# EAGLE board TOP_pcb_redonda (EAGLE 9.6.2)
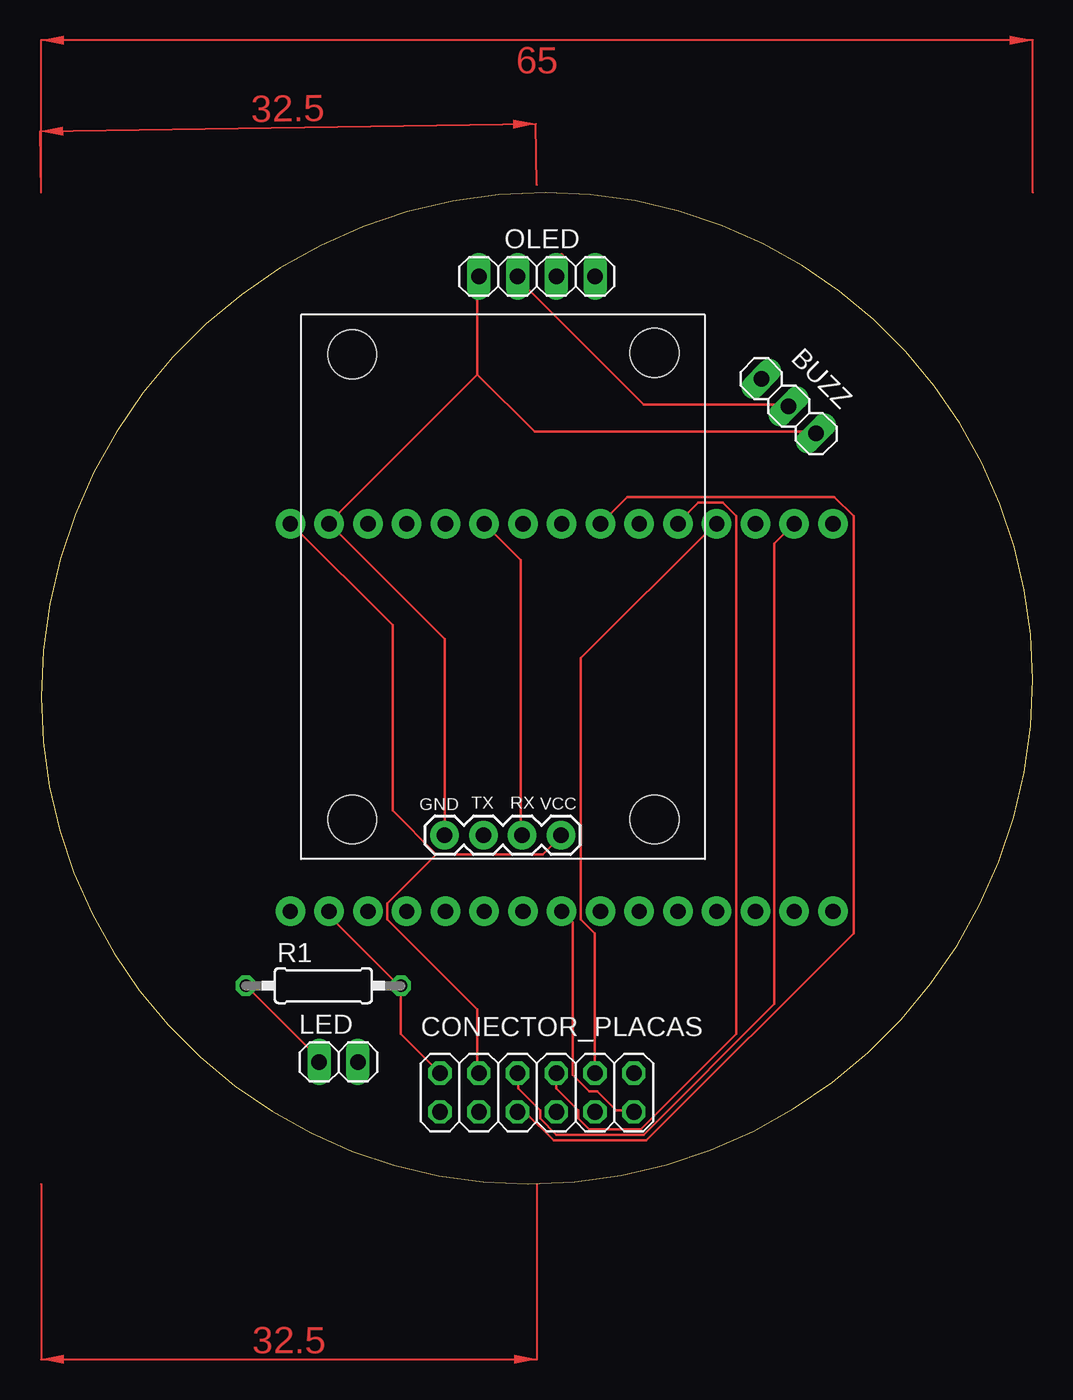
[diagram p0: board, top side]
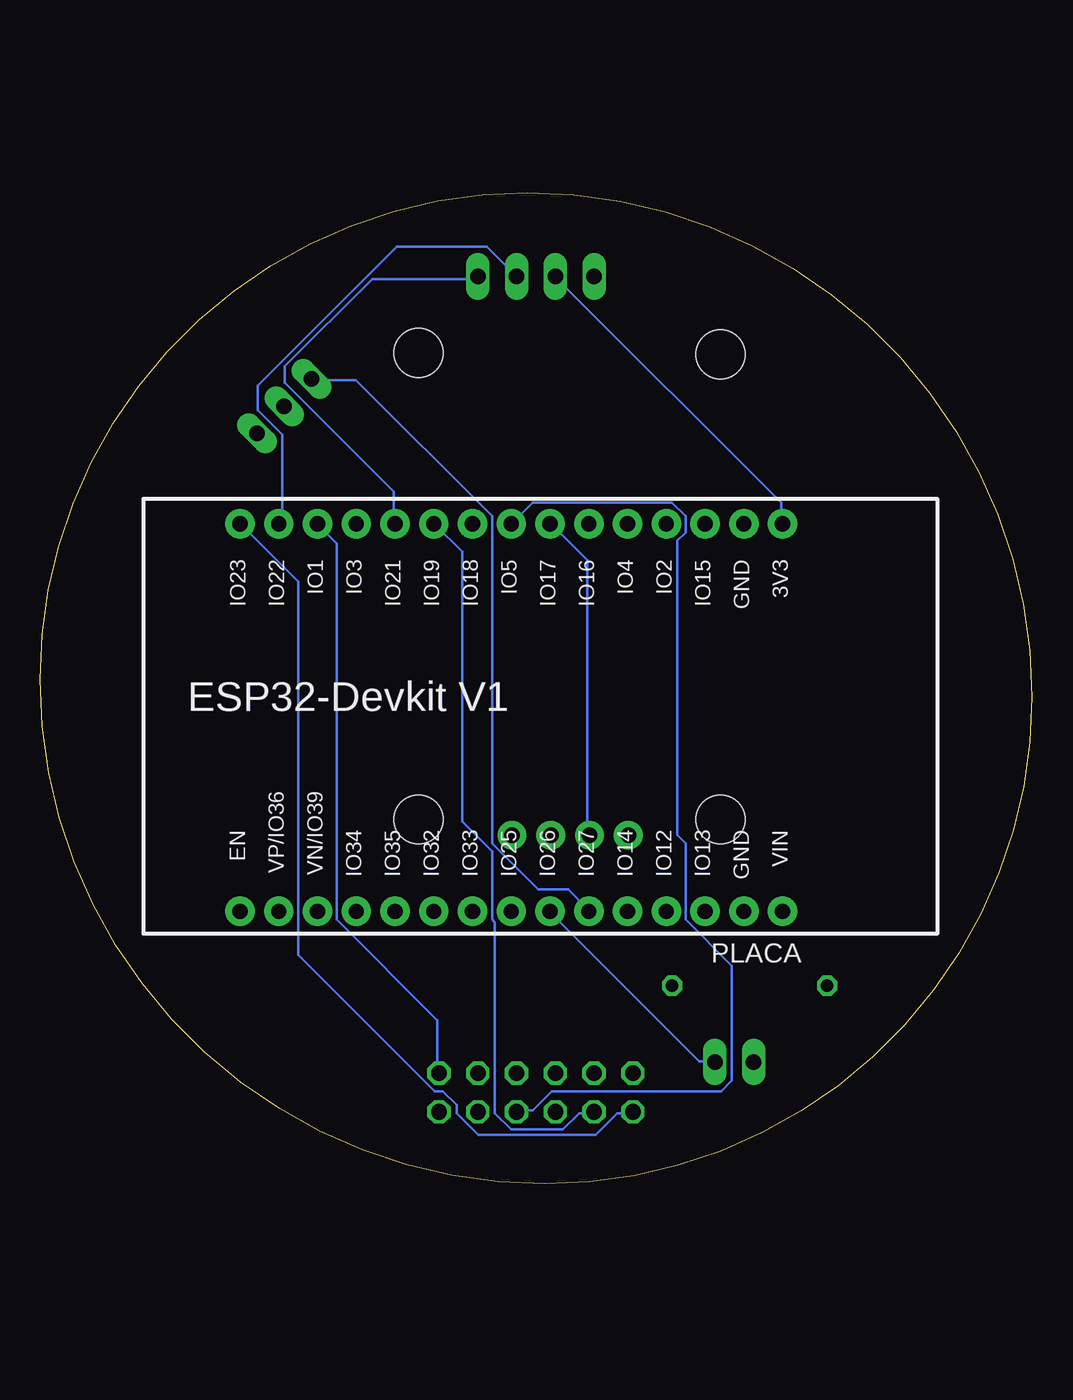
[diagram p1: board, bottom side, seen from below]

Size 65 x 65 mm. Coordinates in mm from the lower left corner, seen from the top.
Outline: 0,31.93 arc90 31.93,0 arc90 65,33.06 arc90 33.06,65 arc90 0,31.93
Copper layers (1*16): Top 0.035mm / dielectric 1.5mm / Bottom 0.035mm
Design rules "default": minimum track width 6mil, minimum drill 0.35mm, track to track 6mil, track to pad 6mil, pad to pad 6mil, via to via 6mil, smd to smd 6mil, copper to edge 40mil, drill to drill 6mil, minimum pad ring 10mil, minimum via ring 8mil, stop-mask expansion 4mil, vias tented up to drill 0mil, thermal gap 10mil
Net classes: 0 default: clearance 0.205 mm

## Footprints (pad centres in the part's own frame; a part is rotated, then mirrored left to right if it is on the bottom)
1X03 = drill 1.016 long: 1 -2.54,0; 2 0,0; 3 2.54,0
2X06 = drill 1.016 octagon: 1 -6.35,-1.27; 2 -6.35,1.27; 3 -3.81,-1.27; 4 -3.81,1.27; 5 -1.27,-1.27; 6 -1.27,1.27; 7 1.27,-1.27; 8 1.27,1.27; 9 3.81,-1.27; 10 3.81,1.27; 11 6.35,-1.27; 12 6.35,1.27
U-BLOX-NEO6V2 = drill 1.016 pad 1.88: GND 17.05,34.13; RX 11.97,34.13; TX 14.51,34.13; VCC 9.43,34.13 | hole 3.2: 3.3,33.1; 23.1,33.1; 3.3,2.5; 23.1,2.6
1X02 = drill 1.016 long: 1 -1.27,0; 2 1.27,0
1X04 = drill 1.016 long: 1 -3.81,0; 2 -1.27,0; 3 1.27,0; 4 3.81,0
ESP32-DEVKITV1 = drill 1 pad 1.93: 3V3 -16.52,-12.27; D1 13.96,-12.27; D2 -8.9,-12.27; D3 11.42,-12.27; D4 -6.36,-12.27; D5 1.26,-12.27; D12 -8.9,13.135; D13 -11.44,13.135; D14 -6.36,13.135; D15 -11.44,-12.27; D16 -3.82,-12.27; D17 -1.28,-12.27; D18 3.8,-12.27; D19 6.34,-12.27; D21 8.88,-12.27; D22 16.5,-12.27; D23 19.04,-12.27; D25 1.26,13.135; D26 -1.28,13.135; D27 -3.82,13.135; D32 6.34,13.135; D33 3.8,13.135; D34 11.42,13.135; D35 8.88,13.135; D36 16.5,13.135; D39 13.96,13.135; EN 19.04,13.135; GND@1 -13.98,13.135; GND@2 -13.98,-12.27; VIN -16.52,13.135
0207/10 = drill 0.813 octagon: 1 -5.08,0; 2 5.08,0

## Placement (x,y rotation side)
BUZZ  [1X03]  49,51 315 top
CONECTOR_PLACAS  [2X06]  32.5,6 0 top
GPS  U-BLOX-NEO6V2  [U-BLOX-NEO6V2]  43.5,57 180 top
LED  [1X02]  19.5,8 0 top
OLED  [1X04]  32.5,59.5 0 top
PLACA  ESP32DEVKITV1  [ESP32-DEVKITV1]  32.86,31.01 180 bottom
R1  [0207/10]  18.5,13 0 top

## Library data of the parts
BUZZ CONECTOR_PLACAS LED OLED = pinhead
GPS = u-blox neo-6m v2
PLACA = ESP32-DEVKITV1
R1 = rcl; SPICEPREFIX: R

## Nets
GPS: BUZZ.3 GPS.GND OLED.1 PLACA.GND@2
N$1: BUZZ.2 CONECTOR_PLACAS.4 GPS.VCC OLED.2 PLACA.3V3
N$2: CONECTOR_PLACAS.2 PLACA.GND@1 R1.2
N$4: CONECTOR_PLACAS.6 OLED.3 PLACA.D22
N$5: CONECTOR_PLACAS.8 OLED.4 PLACA.D21
N$6: CONECTOR_PLACAS.10 PLACA.D3
N$7: CONECTOR_PLACAS.12 PLACA.D1
N$8: GPS.RX PLACA.D16
N$9: GPS.TX PLACA.D17
N$10: CONECTOR_PLACAS.11 PLACA.D25
N$11: LED.2 PLACA.D26
N$12: LED.1 R1.1
N$13: BUZZ.1 PLACA.D27
N$14: CONECTOR_PLACAS.1 PLACA.D23
N$15: CONECTOR_PLACAS.3 PLACA.D19
N$16: CONECTOR_PLACAS.5 PLACA.D18
N$17: CONECTOR_PLACAS.7 PLACA.D5

## Tracks (layer width: path | path; a pad name or v marks a point on that pad's centre or on a via)
GPS
  Top 0.152: 28.59,53.07 28.59,59.33 OLED.1 | 28.59,53.07 18.94,43.42 PLACA.GND@2 18.94,43.24 26.45,35.74 GPS.GND | 28.59,53.07 32.34,49.32 50.75,49.32 BUZZ.3
N$1
  Top 0.152: 25.91,21.62 22.7,18.41 22.7,17.33 28.59,11.44 28.59,7.33 CONECTOR_PLACAS.4 | 25.91,21.62 32.88,21.62 33.95,22.7 GPS.VCC | BUZZ.2 48.96,51.11 39.49,51.11 31.27,59.33 OLED.2 | 25.91,21.62 23.05,24.48 23.05,36.63 16.44,43.24 PLACA.3V3
  Bottom 0.152: PLACA.3V3 16.44,43.42 16.44,44.67 31.09,59.33 OLED.2
N$2
  Top 0.152: CONECTOR_PLACAS.2 26.09,7.33 23.59,9.83 23.59,12.87 R1.2 23.41,13.04 18.94,17.51 18.94,17.87 PLACA.GND@1
N$4
  Top 0.152: 34.37,60.6 34.36,60.61 | 34.36,60.61 34.14,60.96 | 34.36,60.61 34.31,60.58 34.31,60.04 OLED.3 | CONECTOR_PLACAS.6 31.27,7.15 31.27,6.25 32.7,4.83 32.7,4.29 33.77,3.22 39.49,3.22 48.07,11.79 48.07,41.99 49.32,43.24 PLACA.D22
  Bottom 0.152: OLED.3 35.74,61.47 41.64,61.47 50.75,52.36 50.75,50.75 49.14,49.14 49.14,43.6 49.32,43.42 PLACA.D22
N$5
  Top 0.152: CONECTOR_PLACAS.8 33.77,7.15 33.77,6.25 35.2,4.83 35.2,4.29 35.92,3.57 39.31,3.57 45.57,9.83 45.57,43.78 44.67,44.67 43.07,44.67 41.82,43.42 PLACA.D21
  Bottom 0.152: OLED.4 36.45,59.33 43.24,59.33 48.96,53.61 48.96,52.54 41.82,45.39 41.82,43.42 PLACA.D21
N$6
  Top 0.152: CONECTOR_PLACAS.10 36.28,7.33 36.28,16.44 35.38,17.33 35.38,34.49 44.14,43.24 PLACA.D3
N$7
  Bottom 0.152: CONECTOR_PLACAS.12 38.96,7.33 38.96,10.72 45.57,17.33 45.57,41.99 46.82,43.24 PLACA.D1
N$8
  Top 0.152: GPS.RX 31.45,22.87 31.45,40.92 29.13,43.24 PLACA.D16
N$9
  Bottom 0.152: 29.04,22.93 GPS.TX 29.13,22.87 29.13,40.92 31.45,43.24 PLACA.D17
N$10
  Top 0.152: CONECTOR_PLACAS.11 38.78,4.83 37.71,4.83 36.45,6.08 35.92,6.08 34.85,7.15 34.85,17.16 34.13,17.87 PLACA.D25
N$11
  Bottom 0.152: 20.81,8.01 LED.2 20.91,8.04 21.8,8.04 31.45,17.69 PLACA.D26 31.46,17.76
N$12
  Top 0.152: R1.1 13.58,12.87 18.41,8.04 LED.1
N$13
  Bottom 0.152: 47.18,52.66 BUZZ.1 47.18,52.72 44.32,52.72 35.38,43.78 35.38,22.34 32.34,19.3 30.38,19.3 29.13,18.05 PLACA.D27 29.18,17.92
N$14
  Bottom 0.152: CONECTOR_PLACAS.1 26.27,4.65 27.16,4.65 28.59,3.22 36.28,3.22 37.71,4.65 37.71,5.18 38.6,6.08 39.13,6.08 48.07,15.01 48.07,39.49 51.82,43.24 PLACA.D23
N$15
  Bottom 0.152: CONECTOR_PLACAS.3 28.77,4.65 29.66,4.65 30.74,3.57 34.13,3.57 35.2,4.65 35.2,17.16 35.38,17.33 35.38,21.8 37.35,23.77 37.35,41.46 39.13,43.24 PLACA.D19
N$16
  Top 0.152: CONECTOR_PLACAS.5 31.27,4.65 31.81,4.65 33.6,2.86 39.67,2.86 53.25,16.44 53.25,43.78 52,45.03 38.42,45.03 36.81,43.42 PLACA.D18
N$17
  Bottom 0.152: CONECTOR_PLACAS.7 33.6,4.83 32.7,4.83 31.45,6.08 20.37,6.08 19.66,6.79 19.66,14.3 22.7,17.33 22.7,22.34 23.23,22.87 23.23,42.17 22.7,42.71 22.7,43.78 23.59,44.67 32.7,44.67 33.95,43.42 PLACA.D5
(copper drawn outside any net)
  shapes: Top area x3